# Altium PCB Strommessplatine.PcbDoc (part 1 of 2)
Units mm, origin at the board's own origin, x right, y up, seen from the top; angles counter-clockwise.
Board outline 160 x 100 mm, 4 copper layers (Top Layer, GND, VCC+, 2V5_OCM), stack 1.744 mm thick; 210 components, 62 nets, 482 pads, 189 vias.
Unrouted connection lines stored in the file: 1.
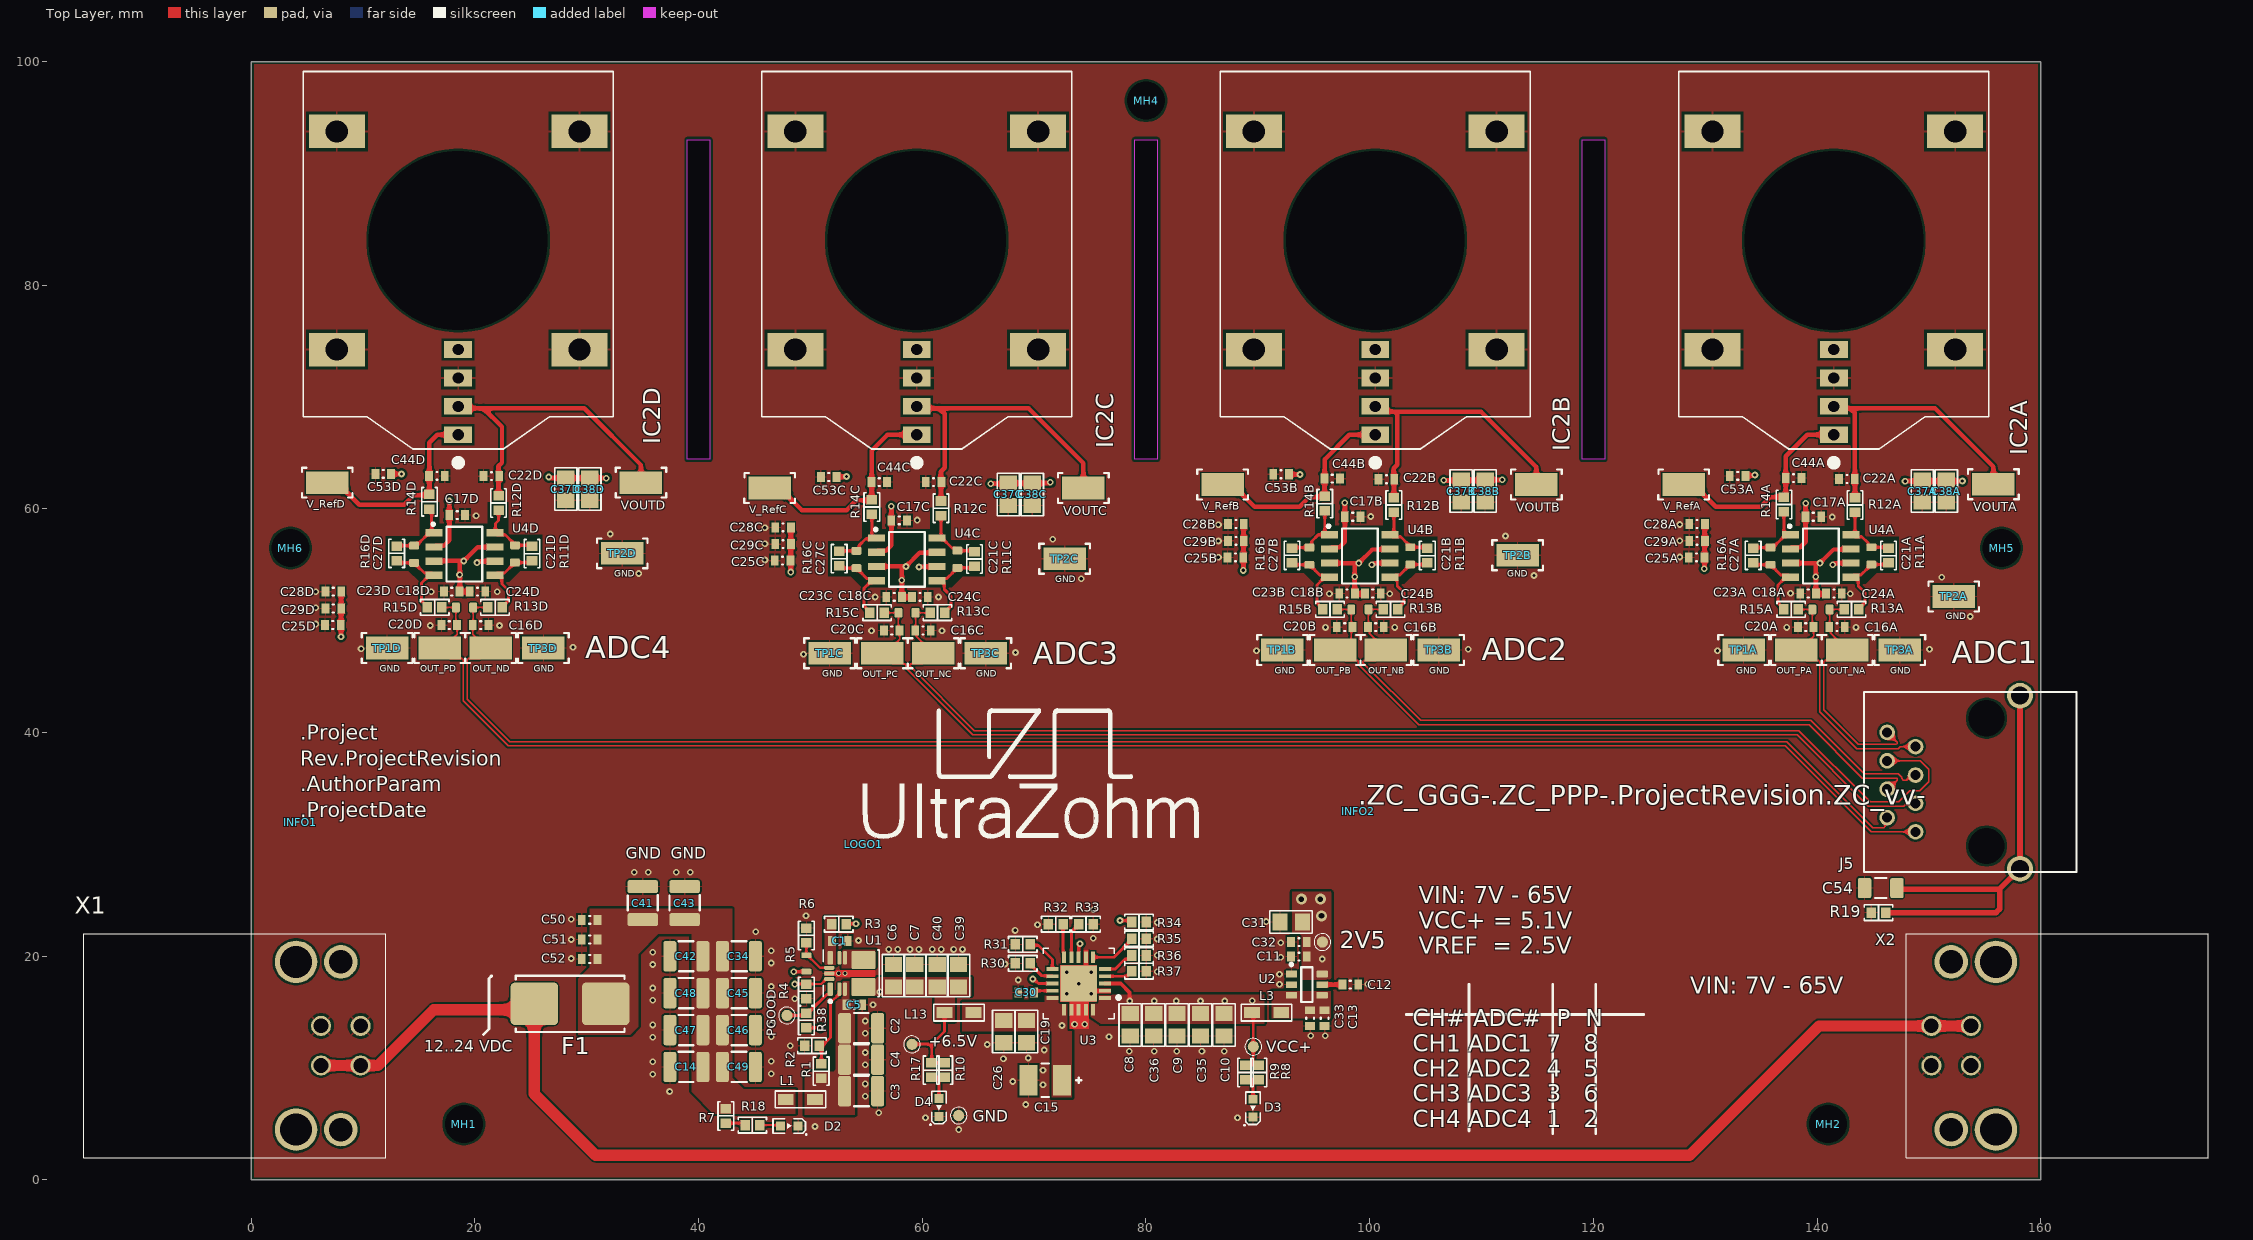
[diagram p0: Top Layer view]
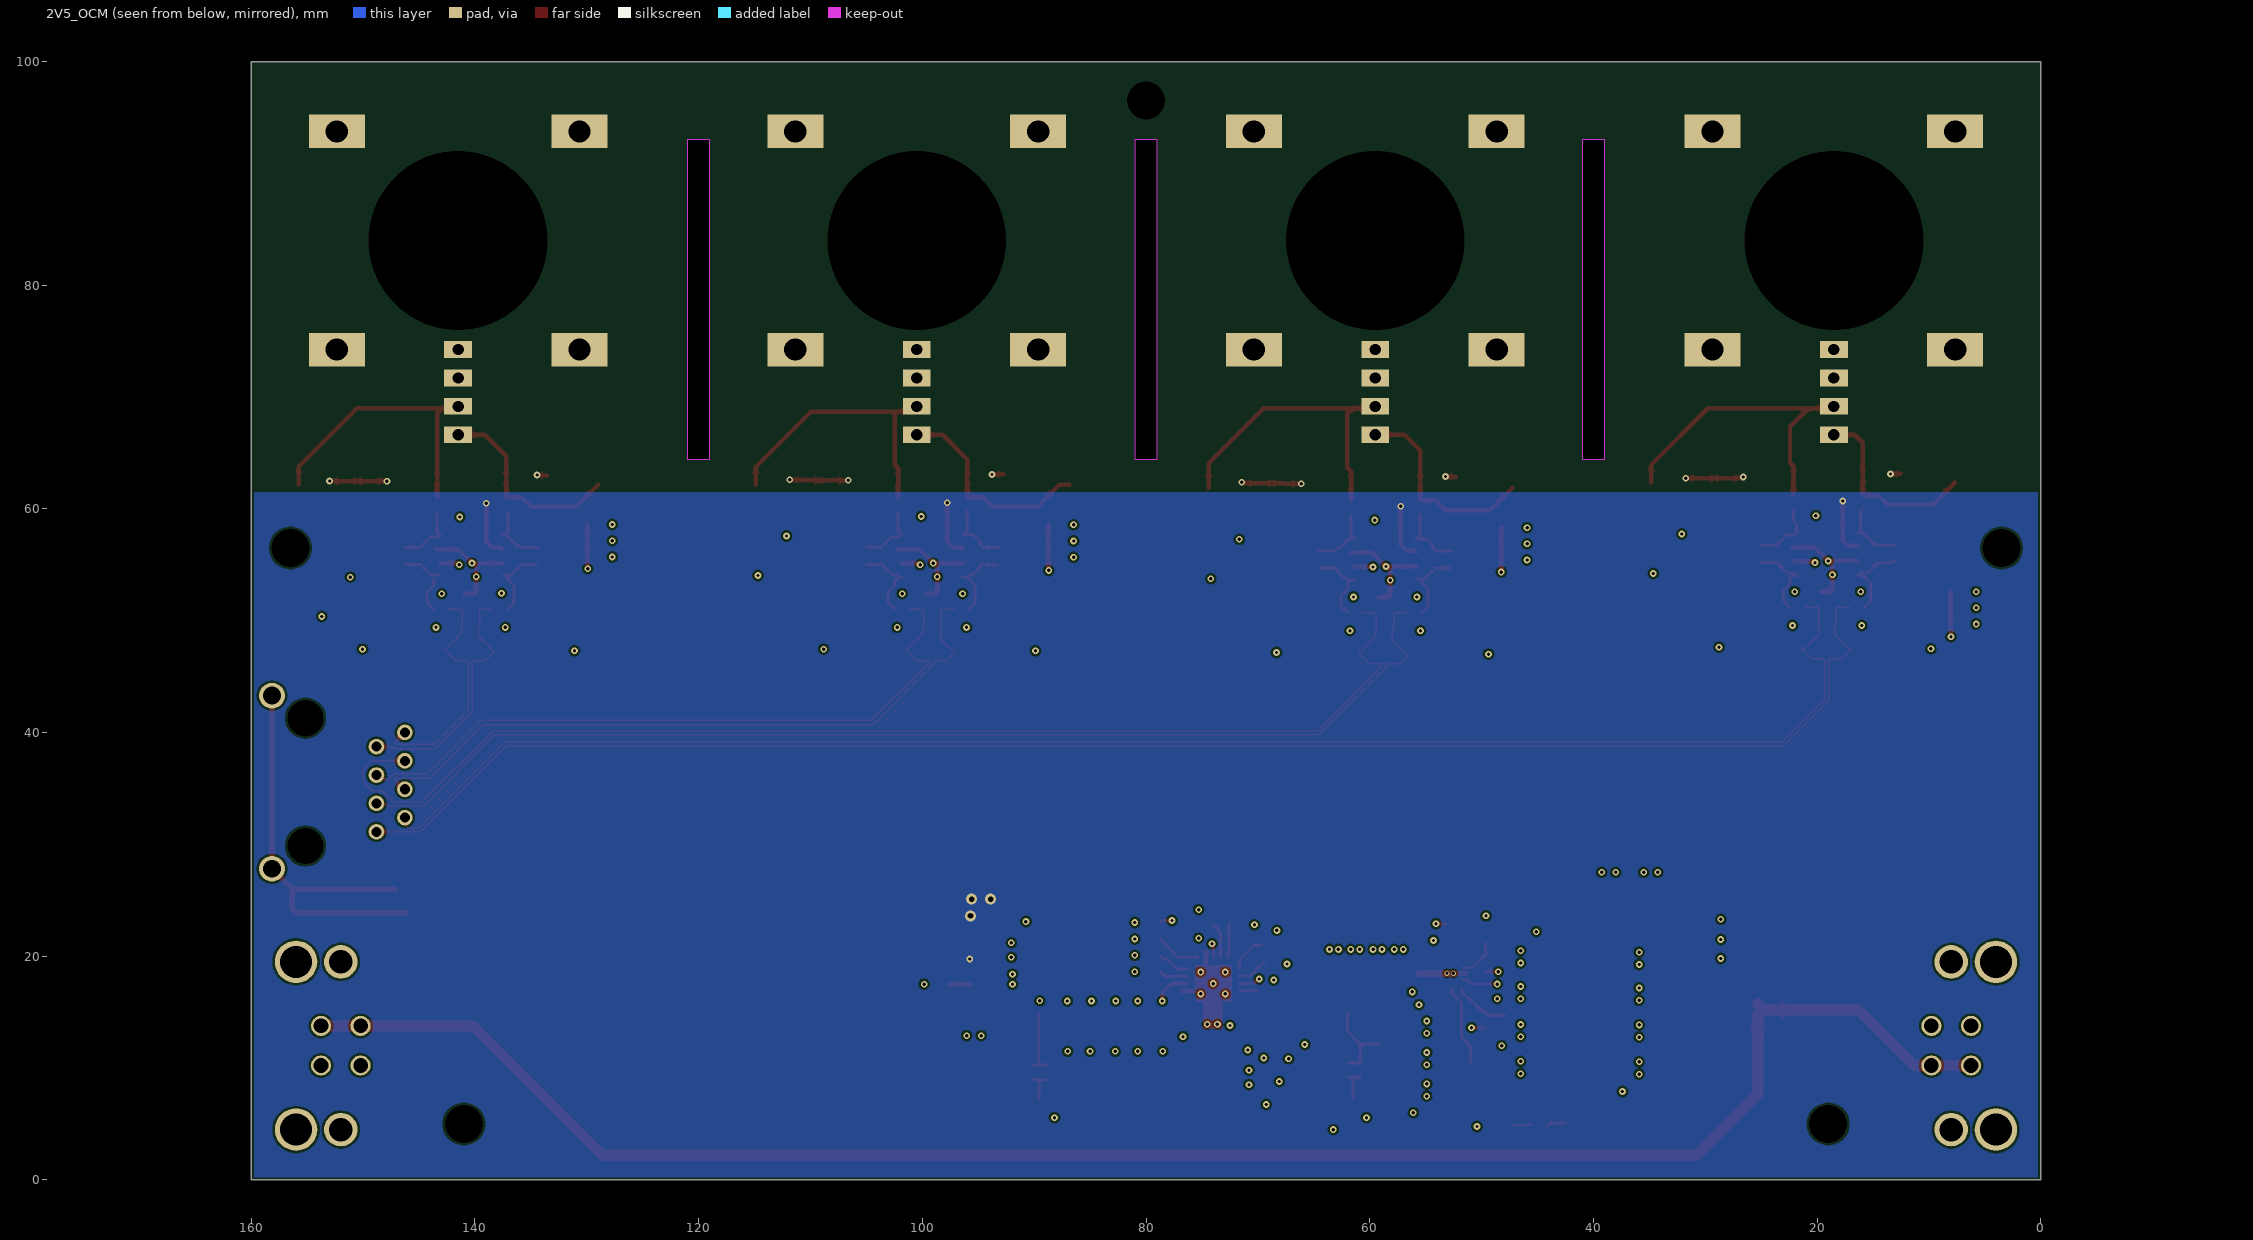
[diagram p1: 2V5_OCM view, seen from below]
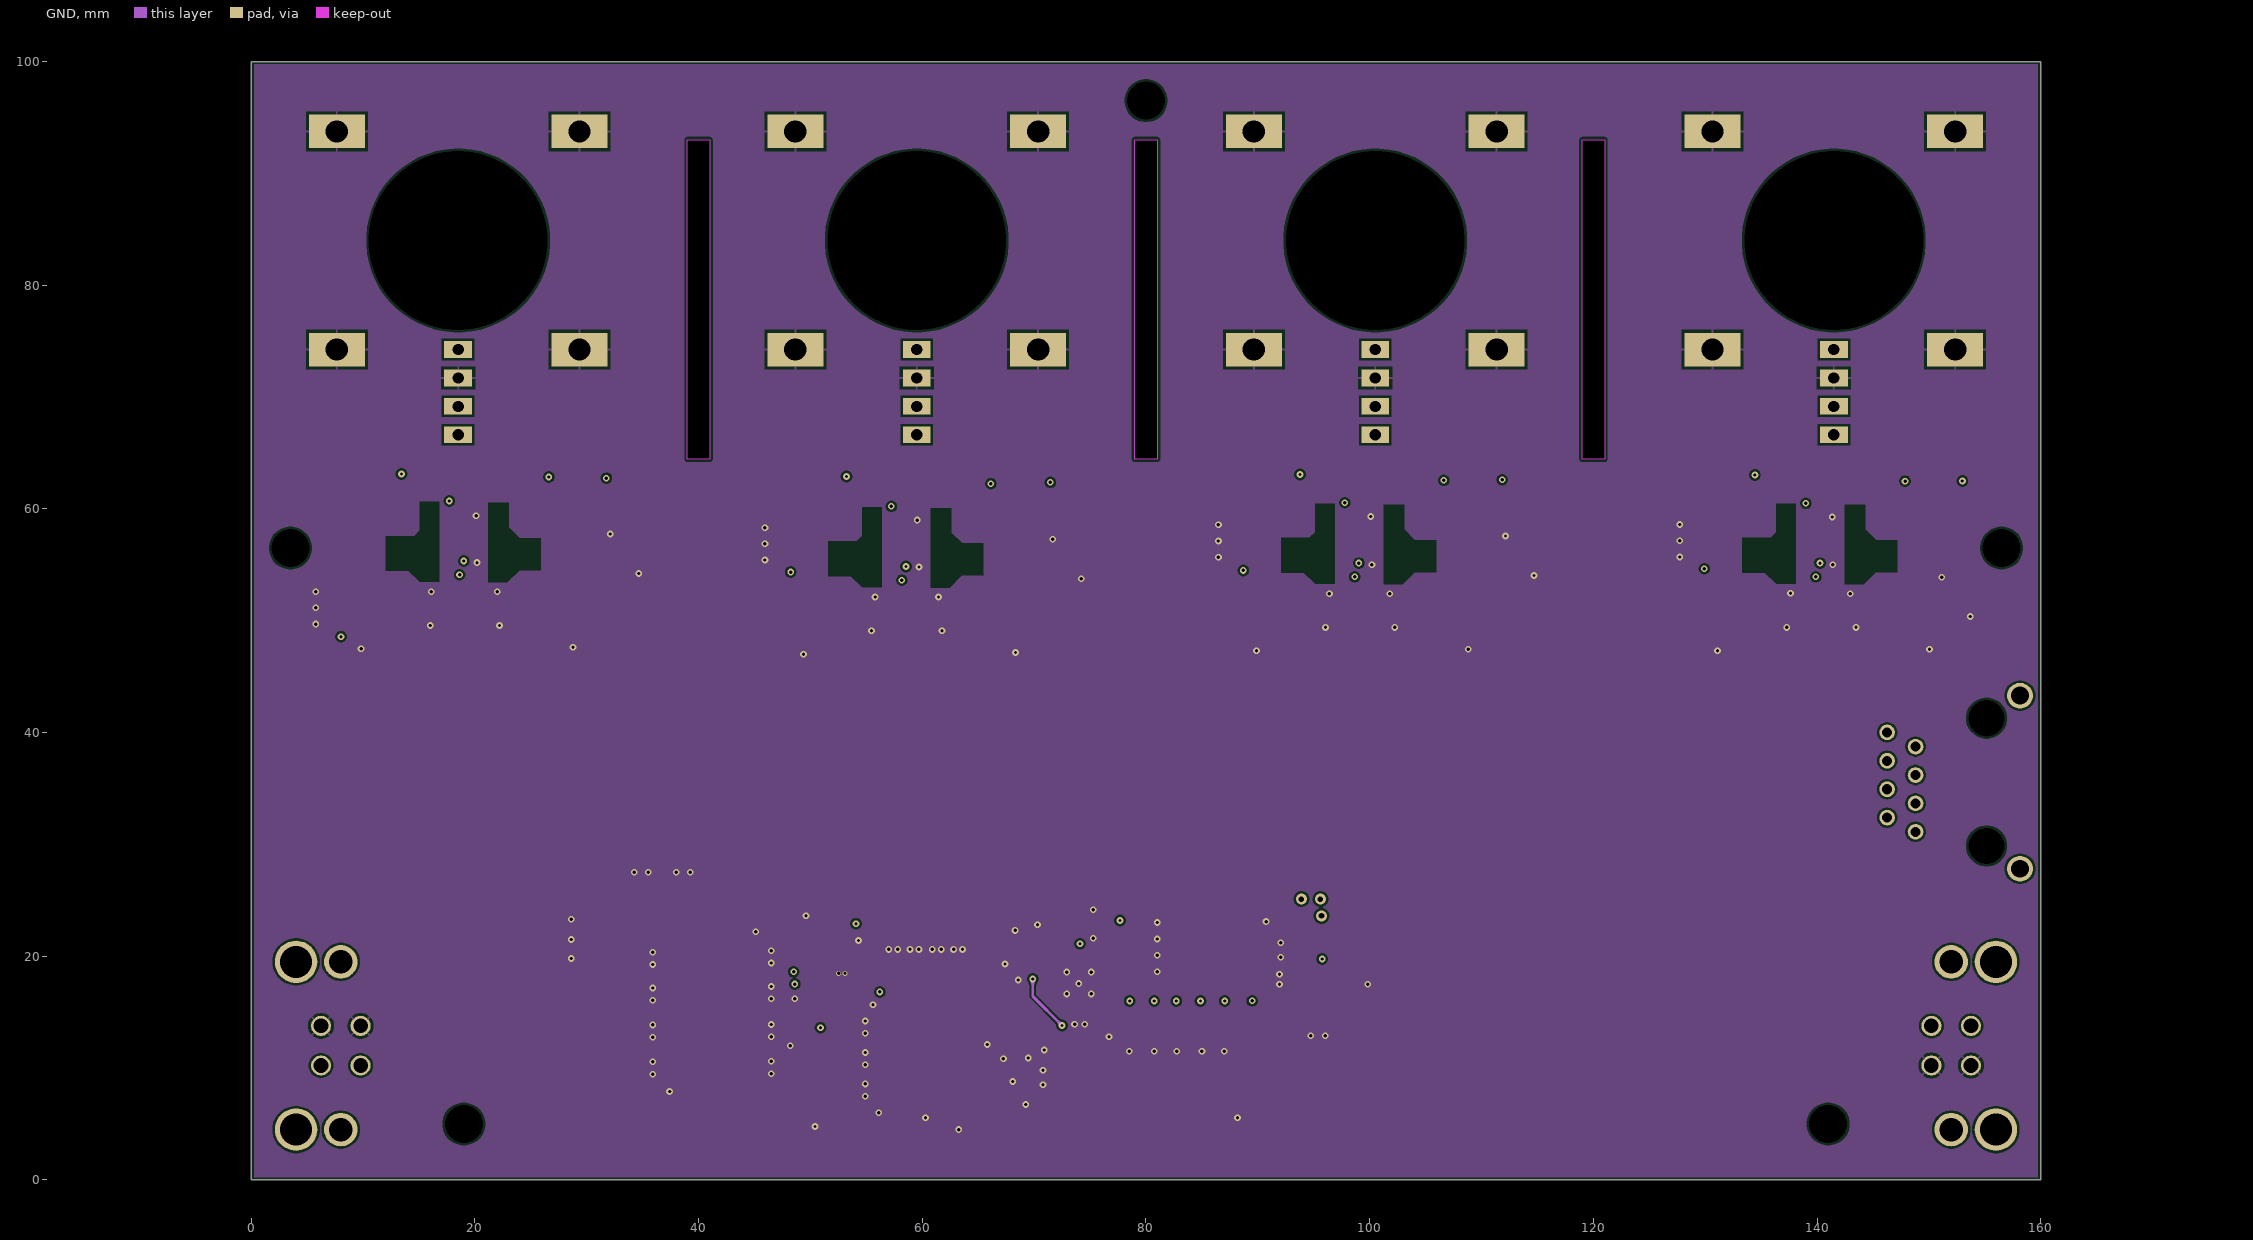
[diagram p2: GND]
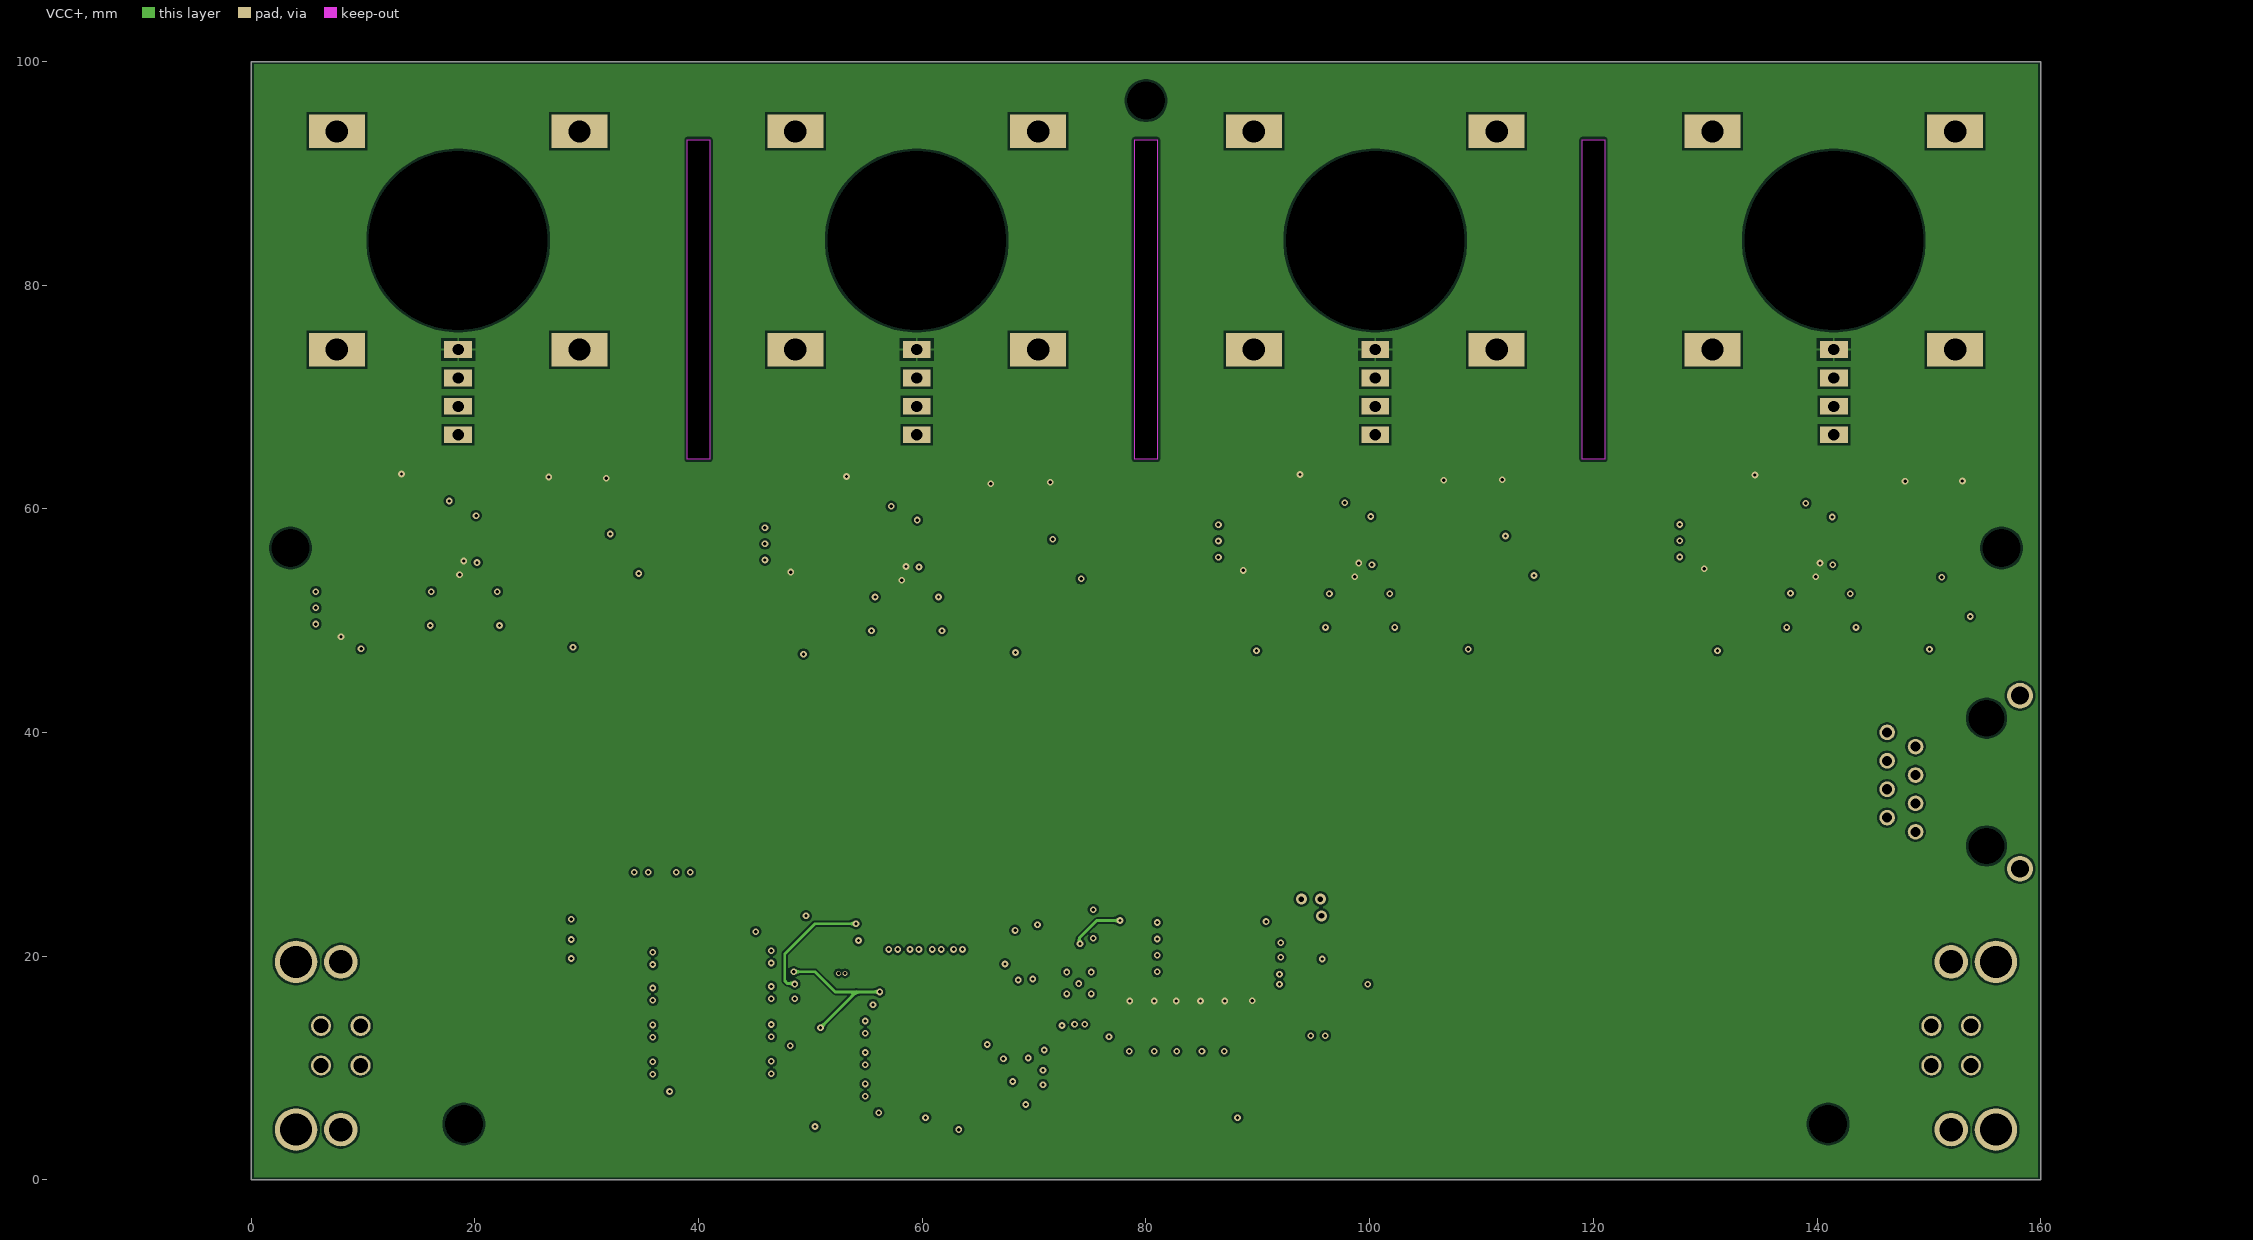
[diagram p3: VCC+]
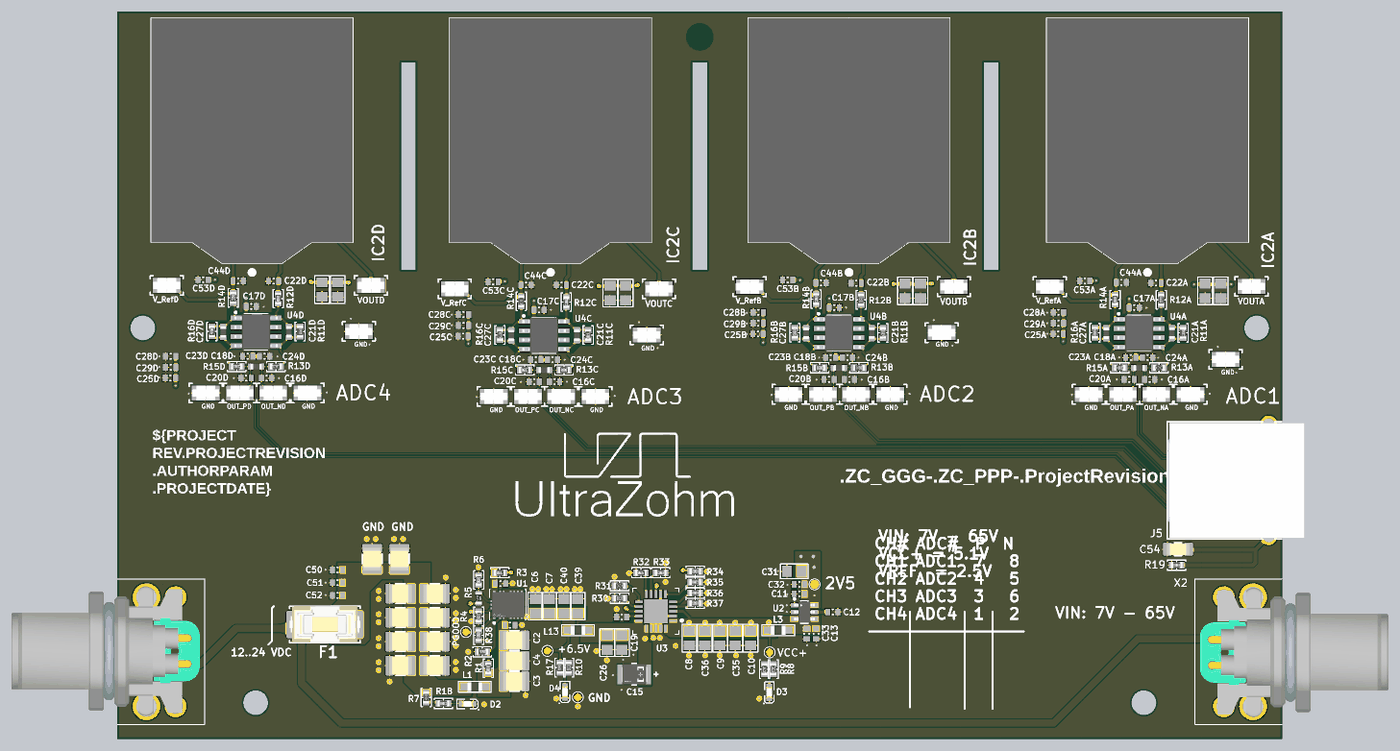
[diagram p5: 3D render of the assembled board from above, using the file's embedded part models]

## Layer stack, top to bottom
Top Solder: solder mask 0.01, Solder Resist, Dk 3.5
Top Layer: signal copper 0.07
Dielectric 2: prepreg 0.0994, JLC3313, Dk 4.05
GND: signal copper 0.07
Core: core 1.265, FR4, Dk 4.6
VCC+: signal copper 0.07
Dielectric 4: prepreg 0.0994, JLC3313, Dk 4.05
2V5_OCM: signal copper 0.07
Bottom Solder: solder mask 0.01, Solder Resist, Dk 3.5

## Board outline
0,0 0,100 160,100 160,0
cut-out: 79,64.46 79,93 80.999,93 80.999,64.46
cut-out: 39,64.46 39,93 40.999,93 40.999,64.46
cut-out: 119.002,64.46 119.002,93 121,93 121,64.46

## Design rules (kind name [scope] priority, off if disabled: settings)
BoardOutlineClearance [All] p1: gap=0.254 ignorepadtopadclearanceinfootprint=FALSE except(0: Arc-SplitContinuation Track-SplitContinuation SMDPad-SplitContinuation THPad-SplitContinuation Via-SplitContinuation Fill-SplitContinuation Poly-SplitContinuation Region-SplitContinuation Text-SplitContinuation)
Clearance Clearance_Power [InNetClass('All Nets')] p1: gap=0.2 ignorepadtopadclearanceinfootprint=FALSE except(0.1: SMDPad-SMDPad SMDPad-Fill SMDPad-Poly SMDPad-Region; 0.127: SMDPad-THPad THPad-THPad; 0.15: Arc-SMDPad Arc-Fill Arc-Poly Arc-Region Track-SMDPad Track-Fill Track-Poly Track-Region; 0.254: Arc-Arc Arc-Track Arc-Via Arc-Text Track-Track Track-Via Track-Text)
DiffPairsRouting [All] p1: maxlimit=0.254 minlimit=0.127 mostfreqgap=0.254 toplayer_minwidth=0.127 toplayer_maxwidth=0.127 toplayer_prefwidth=0.127 midlayer1_minwidth=0.127 midlayer1_maxwidth=0.127 midlayer1_prefwidth=0.127 midlayer2_minwidth=0.127 midlayer2_maxwidth=0.127 midlayer2_prefwidth=0.127 bottomlayer_minwidth=0.127 bottomlayer_maxwidth=0.127 bottomlayer_prefwidth=0.127 maxuncoupledlength=12.7
Height [All] p1: minheight=0 maxheight=40 prefheight=12.7
PolygonConnect PolygonConnect_GND [InNet('GND')] p1: thpad.connectstyle=Relief thpad.reliefconductorwidth=0.2 thpad.reliefentries=4 thpad.polygonreliefangle="90 Angle" thpad.airgapwidth=0.254 thpad.conductorbypadedge=TRUE thpad.mindistance=0.381 thpad.enablemindistance=FALSE smdpad.connectstyle=Relief smdpad.reliefconductorwidth=0.15 smdpad.reliefentries=4 smdpad.polygonreliefangle="90 Angle" smdpad.airgapwidth=0.15 via.connectstyle=Direct via.reliefconductorwidth=0.254 via.reliefentries=4 via.polygonreliefangle="90 Angle" via.airgapwidth=0.254
PolygonConnect PolygonConnect_VCC [InNet('VCC+')] p2: thpad.connectstyle=Relief thpad.reliefconductorwidth=0.2 thpad.reliefentries=4 thpad.polygonreliefangle="90 Angle" thpad.airgapwidth=0.254 thpad.conductorbypadedge=TRUE thpad.mindistance=0.381 thpad.enablemindistance=FALSE smdpad.connectstyle=Direct smdpad.reliefconductorwidth=0.15 smdpad.reliefentries=4 smdpad.polygonreliefangle="90 Angle" smdpad.airgapwidth=0.15 via.connectstyle=Direct via.reliefconductorwidth=0.254 via.reliefentries=4 via.polygonreliefangle="90 Angle" via.airgapwidth=0.254
PolygonConnect [All] p3: connectstyle=Direct reliefconductorwidth=0.254 reliefentries=4 polygonreliefangle="90 Angle" airgapwidth=0.254
RoomDefinition CurrentMeasuerment_1 [InComponentClass('CurrentMeasuerment_1')] p1: confinementstyle=ConfineIn formatcopy=TRUE lockcomponents=FALSE outline 123.904,44.725 159.425,44.725 159.425,100.7 123.904,100.7
RoomDefinition CurrentMeasuerment_2 [InComponentClass('CurrentMeasuerment_2')] p2: confinementstyle=ConfineIn formatcopy=TRUE lockcomponents=FALSE outline 82.95,44.675 118.375,44.675 118.375,100.775 82.95,100.775
RoomDefinition U_Spannungswandlung [InComponentClass('U_Spannungswandlung')] p3: confinementstyle=ConfineIn formatcopy=TRUE lockcomponents=FALSE outline 33.025,0.675 102.475,0.675 102.475,28.475 33.025,28.475
RoomDefinition CurrentMeasuerment_3 [InComponentClass('CurrentMeasuerment_3')] p4: confinementstyle=ConfineIn formatcopy=TRUE lockcomponents=FALSE outline 41.725,44.3 77.75,44.3 77.75,100.55 41.725,100.55
RoomDefinition CurrentMeasuerment_4 [InComponentClass('CurrentMeasuerment_4')] p5: confinementstyle=ConfineIn formatcopy=TRUE lockcomponents=FALSE outline 1.525,44.275 37.675,44.275 37.675,100.4 1.525,100.4
RoutingVias [All] p1: holewidth=0 width=0 viastyle="Through Hole" minholewidth=0 minwidth=0 maxholewidth=0.711 maxwidth=1.27
SolderMaskExpansion [All] p1: expansion=0.102 istentingtop=FALSE
UnRoutedNet [All] p1: checkbadconnections=TRUE
Width [All] p1: maxlimit=10 minlimit=0.16 preferedwidth=0.254 midlayer1_maxwidth=0.254 midlayer2_maxwidth=0.254 minimp=50.000000 maximp=50.000000 favimp=50.000000
27 further rules are at their usual default settings.

## Classes and differential pairs
component class Power_Supply: C50 C51 C52 F1 X1 X2
channel class Measurement: CurrentMeasuerment_1 CurrentMeasuerment_2 CurrentMeasuerment_3 CurrentMeasuerment_4
component class U_Spannungswandlung: 2V5 +6.5V C1 C2 C3 C4 C5 C6 C7 C8 C9 C10 C11 C12 C13 C15 C19 C26 C30 C31 C32 C33 C35 C36 C39 C40 D2 D3 D4 GND L1 L3 L13 PGOOD R1 R2 R3 R4 R5 R6 R7 R8 R9 R10 R17 R18 R30 R31 R32 R33 R34 R35 R36 R37 R38 U1 U2 U3 VCC+
component class TopSheet: C14 C34 C41 C42 C43 C45 C46 C47 C48 C49 C54 INFO1 INFO2 J5 LOGO1 MH1 MH2 MH4 MH5 MH6 R19
component class CurrentMeasuerment_4: C16D C17D C18D C20D C21D C22D C23D C24D C25D C27D C28D C29D C37D C38D C44D C53D IC2D OUT_ND OUT_PD R11D R12D R13D R14D R15D R16D TP1D TP2D TP3D U4D V_RefD VOUTD
component class CurrentMeasuerment_3: C16C C17C C18C C20C C21C C22C C23C C24C C25C C27C C28C C29C C37C C38C C44C C53C IC2C OUT_NC OUT_PC R11C R12C R13C R14C R15C R16C TP1C TP2C TP3C U4C V_RefC VOUTC
component class CurrentMeasuerment_2: C16B C17B C18B C20B C21B C22B C23B C24B C25B C27B C28B C29B C37B C38B C44B C53B IC2B OUT_NB OUT_PB R11B R12B R13B R14B R15B R16B TP1B TP2B TP3B U4B V_RefB VOUTB
component class CurrentMeasuerment_1: C16A C17A C18A C20A C21A C22A C23A C24A C25A C27A C28A C29A C37A C38A C44A C53A IC2A OUT_NA OUT_PA R11A R12A R13A R14A R15A R16A TP1A TP2A TP3A U4A V_RefA VOUTA
differential pair I3_OUT: +I3_OUT_P -I3_OUT_N
differential pair I4_OUT: +I4_OUT_P -I4_OUT_N
differential pair I2_OUT: +I2_OUT_P -I2_OUT_N
differential pair I1_OUT: +I1_OUT_P -I1_OUT_N

## Components (designator, comment, footprint, x,y, rotation, side; value= is the part's Value field where it differs from the comment)
2V5 "2V5" TP_1mm 95.772,21.264 r90 top value="Testpoint 1mm"
+6.5V "6.5 V" TP_1mm 59.075,12.125 r90 top value="Testpoint 1mm"
C1 "1 µF" C_0603 52.629,21.364 r0 top
C2 "2.2 µF" C_1210_TE 54.529,13.564 r0 top
C3 "2.2 µF" C_1210_TE 54.529,7.939 r0 top
C4 "2.2 µF" C_1210_TE 54.529,10.751 r0 top
C5 "100 nF" C_0603 53.929,15.664 r180 top
C6 "10 µF" C0805 57.429,18.264 r270 top
C7 "10 µF" C0805 59.329,18.264 r270 top
C8 "10 µF" C0805 78.579,13.864 r90 top
C9 "10 µF" C0805 82.779,13.864 r90 top
C10 "10 µF" C0805 86.979,13.864 r90 top
C11 "1 µF" C_0603 93.679,19.964 r0 top
C12 "1 µF" C_0603 98.279,17.464 r180 top
C13 "1 µF" C_0603 95.979,14.464 r90 top
C14 "2.2 µF" C_1210_TE 38.9,10.1 r180 top
C15 "47 uF" 10TPE47MAZB 70.994,8.911 r0 top
C16A "470 pF" C_0603 141.787,49.425 r180 top (schematic designator C16)
C16B "470 pF" C_0603 100.558,49.425 r180 top (schematic designator C16)
C16C "470 pF" C_0603 60.06,49.125 r180 top (schematic designator C16)
C16D "470 pF" C_0603 20.5,49.6 r180 top (schematic designator C16)
C17A "100 nF" C_0603 139.675,59.3 r0 top (schematic designator C17)
C17B "100 nF" C_0603 98.475,59.3 r0 top (schematic designator C17)
C17C "100 nF" C_0603 57.925,58.975 r0 top (schematic designator C17)
C17D "100 nF" C_0603 18.4,59.45 r0 top (schematic designator C17)
C18A "5.6nF" C_0603_TE 140.354,51.011 r270 top (schematic designator C18)
C18B "5.6nF" C_0603_TE 99.125,51.011 r270 top (schematic designator C18)
C18C "5.6nF" C_0603_TE 58.627,50.711 r270 top (schematic designator C18)
C18D "5.6nF" C_0603_TE 19.067,51.186 r270 top (schematic designator C18)
C19 "10 µF" C0805 69.316,13.264 r90 top
C20A "470 pF" C_0603 138.987,49.425 r180 top (schematic designator C20)
C20B "470 pF" C_0603 97.758,49.425 r180 top (schematic designator C20)
C20C "470 pF" C_0603 57.26,49.125 r180 top (schematic designator C20)
C20D "470 pF" C_0603 17.7,49.6 r180 top (schematic designator C20)
C21A "22pF" C_0603_TE 144.862,55.8 r180 top (schematic designator C21)
C21B "22pF" C_0603_TE 103.633,55.8 r180 top (schematic designator C21)
C21C "22pF" C_0603_TE 63.135,55.5 r180 top (schematic designator C21)
C21D "22pF" C_0603_TE 23.575,55.975 r180 top (schematic designator C21)
C22A "4.7 nF" C_0603 142.675,62.675 r0 top (schematic designator C22)
C22B "4.7 nF" C_0603 101.5,62.65 r0 top (schematic designator C22)
C22C "4.7 nF" C_0603 61,62.4 r0 top (schematic designator C22)
C22D "4.7 nF" C_0603 21.475,62.925 r0 top (schematic designator C22)
C23A "100 nF" C_0603 139.206,52.433 r0 top (schematic designator C23)
C23B "100 nF" C_0603 97.978,52.433 r0 top (schematic designator C23)
C23C "100 nF" C_0603 57.48,52.133 r0 top (schematic designator C23)
C23D "100 nF" C_0603 17.92,52.608 r0 top (schematic designator C23)
C24A "100 nF" C_0603 141.512,52.433 r180 top (schematic designator C24)
C24B "100 nF" C_0603 100.284,52.433 r180 top (schematic designator C24)
C24C "100 nF" C_0603 59.786,52.133 r180 top (schematic designator C24)
C24D "100 nF" C_0603 20.226,52.608 r180 top (schematic designator C24)
C25A "1 µF" C_0603 129.228,55.667 r0 top (schematic designator C25)
C25B "1 µF" C_0603 87.999,55.667 r0 top (schematic designator C25)
C25C "1 µF" C_0603 47.501,55.367 r0 top (schematic designator C25)
C25D "1 µF" C_0603 7.291,49.617 r0 top (schematic designator C25)
C26 "10 µF" C0805 67.279,13.264 r90 top
C27A "22pF" C_0603_TE 135.837,55.775 r180 top (schematic designator C27)
C27B "22pF" C_0603_TE 94.608,55.775 r180 top (schematic designator C27)
C27C "22pF" C_0603_TE 54.11,55.475 r180 top (schematic designator C27)
C27D "22pF" C_0603_TE 14.55,55.95 r180 top (schematic designator C27)
C28A "100 nF" C_0603 129.272,58.647 r0 top (schematic designator C28)
C28B "100 nF" C_0603 88.043,58.647 r0 top (schematic designator C28)
C28C "100 nF" C_0603 47.545,58.347 r0 top (schematic designator C28)
C28D "100 nF" C_0603 7.335,52.597 r0 top (schematic designator C28)
C29A "100 nF" C_0603 129.272,57.147 r0 top (schematic designator C29)
C29B "100 nF" C_0603 88.043,57.147 r0 top (schematic designator C29)
C29C "100 nF" C_0603 47.545,56.847 r0 top (schematic designator C29)
C29D "100 nF" C_0603 7.335,51.097 r0 top (schematic designator C29)
C30 "1 µF" C_0603 69.279,16.764 r180 top
C31 "10 µF" C0805 92.979,23.064 r0 top
C32 "100 nF" C_0603 93.679,21.264 r0 top
C33 "100 nF" C_0603 94.679,14.464 r90 top
C34 "2.2 µF" C_1210_TE 43.6,20 r0 top
C35 "10 µF" C0805 84.879,13.864 r90 top
C36 "10 µF" C0805 80.679,13.864 r90 top
C37A "10 µF" C0805 149.414,61.599 r90 top (schematic designator C37)
C37B "10 µF" C0805 108.185,61.599 r90 top (schematic designator C37)
C37C "10 µF" C0805 67.687,61.299 r90 top (schematic designator C37)
C37D "10 µF" C0805 28.127,61.774 r90 top (schematic designator C37)
C38A "10 µF" C0805 151.554,61.6 r90 top (schematic designator C38)
C38B "10 µF" C0805 110.325,61.6 r90 top (schematic designator C38)
C38C "10 µF" C0805 69.827,61.3 r90 top (schematic designator C38)
C38D "10 µF" C0805 30.267,61.775 r90 top (schematic designator C38)
C39 "10 µF" C0805 63.229,18.264 r270 top
C40 "10 µF" C0805 61.329,18.264 r270 top
C41 "2.2 µF" C_1210_TE 35,24.75 r90 top
C42 "2.2 µF" C_1210_TE 38.9,20 r180 top
C43 "2.2 µF" C_1210_TE 38.75,24.75 r90 top
C44A "4.7 nF" C_0603 137.9,62.75 r180 top (schematic designator C44)
C44B "4.7 nF" C_0603 96.65,62.7 r180 top (schematic designator C44)
C44C "4.7 nF" C_0603 56.15,62.4 r180 top (schematic designator C44)
C44D "4.7 nF" C_0603 16.6,62.95 r180 top (schematic designator C44)
C45 "2.2 µF" C_1210_TE 43.6,16.7 r0 top
C46 "2.2 µF" C_1210_TE 43.6,13.4 r0 top
C47 "2.2 µF" C_1210_TE 38.9,13.4 r180 top
C48 "2.2 µF" C_1210_TE 38.9,16.7 r180 top
C49 "2.2 µF" C_1210_TE 43.6,10.1 r0 top
C50 "1 µF" C_0603 30.25,23.25 r180 top
C51 "1 µF" C_0603 30.25,21.5 r180 top
C52 "1 µF" C_0603 30.25,19.75 r180 top
C53A "47 nF" C_0603 132.9,62.95 r0 top (schematic designator C53)
C53B "47 nF" C_0603 92.075,63.1 r0 top (schematic designator C53)
C53C "47 nF" C_0603 51.625,62.85 r0 top (schematic designator C53)
C53D "47 nF" C_0603 11.792,63.125 r0 top (schematic designator C53)
C54 "100pF" C_1206_TE 145.7,26.1 r270 top
D2 "KT-0603R" WL-SMCW_0603 48.1,4.825 r180 top
D3 "KT-0603R" WL-SMCW_0603 89.564,6.411 r90 top
D4 "KT-0603R" WL-SMCW_0603 61.489,6.464 r90 top
F1 "Fuse, 5 A" 0154xxx 28.5,15.75 r0 top
GND "Testpoint 1mm" TP_1mm 63.25,5.75 r0 top
IC2A "HC5FW 100-S" LEM_HC5FW 141.5,66.63 r0 top locked value=100A (schematic designator IC2)
IC2B "HC5FW 100-S" LEM_HC5FW 100.5,66.63 r0 top locked value=100A (schematic designator IC2)
IC2C "HC5FW 100-S" LEM_HC5FW 59.5,66.63 r0 top locked value=100A (schematic designator IC2)
IC2D "HC5FW 100-S" LEM_HC5FW 18.5,66.63 r0 top locked value=100A (schematic designator IC2)
INFO1 "Design Information" Design_info 4.375,32 r0 top
INFO2 "ZC Serialnumber" ZC-Serial 99,32.95 r0 top value=GGG-PPP-VVvv
J5 "R-RJ45R10P-B000" R-RJ45R10P-B000 152.65,35.55 r90 top
L1 "600 Ohm" "WE-CBF_0805_High Current" 49.1,7.2 r0 top
L3 "600 Ohm" "WE-CBF_0805_High Current" 90.779,14.964 r0 top
L13 "600 Ohm" "WE-CBF_0805_High Current" 63.279,14.964 r0 top
LOGO1 "UZ Logo" UZ_Logo_small 54.75,30 r0 top value=Logo
MH1 "Mounting Hole" MH_3.4#1 39.3,7.1 r90 top locked
MH2 "Mounting Hole" MH_3.4#2 156.5,3.5 r90 top locked
MH4 "Mounting Hole" MH_3.4#3 206.4,19.9 r90 top
MH5 "Mounting Hole" MH_3.4#4 156.5,55 r90 top locked
MH6 "Mounting Hole" MH_3.4#4 3.5,55 r90 top locked
OUT_NA "5015" KSTN-5019_V 142.686,47.385 r180 top value="SMD Testpoint" (schematic designator OUT_N)
OUT_NB "5015" KSTN-5019_V 101.457,47.385 r180 top value="SMD Testpoint" (schematic designator OUT_N)
OUT_NC "5015" KSTN-5019_V 60.959,47.085 r180 top value="SMD Testpoint" (schematic designator OUT_N)
OUT_ND "5015" KSTN-5019_V 21.399,47.56 r180 top value="SMD Testpoint" (schematic designator OUT_N)
OUT_PA "5015" KSTN-5019_V 138.144,47.385 r180 top value="SMD Testpoint" (schematic designator OUT_P)
OUT_PB "5015" KSTN-5019_V 96.915,47.385 r180 top value="SMD Testpoint" (schematic designator OUT_P)
OUT_PC "5015" KSTN-5019_V 56.417,47.085 r180 top value="SMD Testpoint" (schematic designator OUT_P)
OUT_PD "5015" KSTN-5019_V 16.857,47.56 r180 top value="SMD Testpoint" (schematic designator OUT_P)
PGOOD "Testpoint 1mm" TP_1mm 47.894,14.711 r90 top
R1 "10k" "RES 0603_1608" 50.95,9.725 r270 top
R2 "100k" "RES 0603_1608" 50.127,12 r180 top
R3 "0R" "RES 0603_1608" 52.529,22.864 r180 top
R4 "0R" "RES 0603_1608" 49.629,16.864 r90 top
R5 "51k" R_0603_TE 49.629,19.364 r0 top
R6 "10k" "RES 0603_1608" 49.629,21.864 r90 top
R7 "10k" "RES 0603_1608" 42.425,5.725 r270 top
R8 "10k" "RES 0603_1608" 90.094,9.611 r270 top
R9 "10k" "RES 0603_1608" 88.894,9.611 r270 top
R10 "10k" "RES 0603_1608" 61.994,9.811 r270 top
R11A "2k" "RES 0603_1608" 146.387,55.825 r270 top (schematic designator R11)
R11B "2k" "RES 0603_1608" 105.158,55.825 r270 top (schematic designator R11)
R11C "2k" "RES 0603_1608" 64.66,55.525 r270 top (schematic designator R11)
R11D "2k" "RES 0603_1608" 25.1,56 r270 top (schematic designator R11)
R12A "1k 0.1%" "RES 0603_1608" 143.396,60.356 r270 top value=1k (schematic designator R12)
R12B "1k 0.1%" "RES 0603_1608" 102.167,60.356 r270 top value=1k (schematic designator R12)
R12C "1k 0.1%" "RES 0603_1608" 61.669,60.056 r270 top value=1k (schematic designator R12)
R12D "1k 0.1%" "RES 0603_1608" 22.109,60.531 r270 top value=1k (schematic designator R12)
R13A "49R9" "RES 0603_1608" 143.087,51.025 r180 top (schematic designator R13)
R13B "49R9" "RES 0603_1608" 101.858,51.025 r180 top (schematic designator R13)
R13C "49R9" "RES 0603_1608" 61.36,50.725 r180 top (schematic designator R13)
R13D "49R9" "RES 0603_1608" 21.8,51.2 r180 top (schematic designator R13)
R14A "1k 0.1%" "RES 0603_1608" 137.041,60.4 r270 top value=1k (schematic designator R14)
R14B "1k 0.1%" "RES 0603_1608" 95.984,60.465 r270 top value=1k (schematic designator R14)
R14C "1k 0.1%" "RES 0603_1608" 55.486,60.165 r270 top value=1k (schematic designator R14)
R14D "1k 0.1%" "RES 0603_1608" 15.926,60.64 r270 top value=1k (schematic designator R14)
R15A "49R9" "RES 0603_1608" 137.687,51.025 r0 top (schematic designator R15)
R15B "49R9" "RES 0603_1608" 96.458,51.025 r0 top (schematic designator R15)
R15C "49R9" "RES 0603_1608" 55.96,50.725 r0 top (schematic designator R15)
R15D "49R9" "RES 0603_1608" 16.4,51.2 r0 top (schematic designator R15)
R16A "2k" "RES 0603_1608" 134.287,55.85 r270 top (schematic designator R16)
R16B "2k" "RES 0603_1608" 93.058,55.85 r270 top (schematic designator R16)
R16C "2k" "RES 0603_1608" 52.56,55.55 r270 top (schematic designator R16)
R16D "2k" "RES 0603_1608" 13,56.025 r270 top (schematic designator R16)
R17 "10k" "RES 0603_1608" 60.794,9.811 r270 top
R18 "10k" "RES 0603_1608" 44.8,4.9 r0 top
R19 "1M" "RES 0603_1608" 145.5,23.9 r180 top
R30 "0R" "RES 0603_1608" 68.979,19.364 r180 top
R31 "0R" "RES 0603_1608" 68.979,21.064 r0 top
R32 "0R" "RES 0603_1608" 71.929,22.864 r0 top
R33 "0R" "RES 0603_1608" 74.629,22.864 r180 top
R34 "0R" "RES 0603_1608" 79.379,23.064 r180 top
R35 "0R" "RES 0603_1608" 79.379,21.564 r0 top
R36 "0R" "RES 0603_1608" 79.379,20.064 r180 top
R37 "0R" "RES 0603_1608" 79.379,18.664 r180 top
R38 "10k" "RES 0603_1608" 49.629,14.264 r270 top
TP1A "5015" KSTN-5019_V 133.432,47.385 r180 top value="SMD Testpoint" (schematic designator TP1)
TP1B "5015" KSTN-5019_V 92.203,47.385 r180 top value="SMD Testpoint" (schematic designator TP1)
TP1C "5015" KSTN-5019_V 51.705,47.085 r180 top value="SMD Testpoint" (schematic designator TP1)
TP1D "5015" KSTN-5019_V 12.145,47.56 r180 top value="SMD Testpoint" (schematic designator TP1)
TP2A "5015" KSTN-5019_V 152.225,52.175 r180 top value="SMD Testpoint" (schematic designator TP2)
TP2B "5015" KSTN-5019_V 113.225,55.85 r180 top value="SMD Testpoint" (schematic designator TP2)
TP2C "5015" KSTN-5019_V 72.727,55.55 r180 top value="SMD Testpoint" (schematic designator TP2)
TP2D "5015" KSTN-5019_V 33.167,56.025 r180 top value="SMD Testpoint" (schematic designator TP2)
TP3A "5015" KSTN-5019_V 147.402,47.385 r0 top value="SMD Testpoint" (schematic designator TP3)
TP3B "5015" KSTN-5019_V 106.173,47.385 r0 top value="SMD Testpoint" (schematic designator TP3)
TP3C "5015" KSTN-5019_V 65.675,47.085 r0 top value="SMD Testpoint" (schematic designator TP3)
TP3D "5015" KSTN-5019_V 26.115,47.56 r0 top value="SMD Testpoint" (schematic designator TP3)
U1 "TPSM365R6" RDN0011A-MFG 53.729,18.464 r90 top
U2 "REF35250QDBVR" TI_SOT23_6-Leads 94.379,17.464 r0 top value=2.5V
U3 "TPS7A4701RGWR" QFN65P500X500X100-21N-D 73.979,17.564 r180 top value="5 V"
U4A "THS4521" SOIC127P600X175-8N 140.346,55.789 r0 top (schematic designator U4)
U4B "THS4521" SOIC127P600X175-8N 99.117,55.789 r0 top (schematic designator U4)
U4C "THS4521" SOIC127P600X175-8N 58.619,55.489 r0 top (schematic designator U4)
U4D "THS4521" SOIC127P600X175-8N 19.059,55.964 r0 top (schematic designator U4)
V_RefA "5015" KSTN-5019_V 128.079,62.175 r180 top value="SMD Testpoint" (schematic designator V_Ref)
V_RefB "5015" KSTN-5019_V 86.85,62.175 r180 top value="SMD Testpoint" (schematic designator V_Ref)
V_RefC "5015" KSTN-5019_V 46.352,61.875 r180 top value="SMD Testpoint" (schematic designator V_Ref)
V_RefD "5015" KSTN-5019_V 6.792,62.35 r180 top value="SMD Testpoint" (schematic designator V_Ref)
VCC+ "VCC+" TP_1mm 89.594,11.911 r90 top value="Testpoint 1mm"
VOUTA "5019" KSTN-5019_V 155.775,62.2 r0 top value="SMD Testpoint" (schematic designator VOUT)
VOUTB "5019" KSTN-5019_V 114.9,62.175 r0 top value="SMD Testpoint" (schematic designator VOUT)
VOUTC "5019" KSTN-5019_V 74.402,61.875 r0 top value="SMD Testpoint" (schematic designator VOUT)
VOUTD "5019" KSTN-5019_V 34.842,62.35 r0 top value="SMD Testpoint" (schematic designator VOUT)
X1 "CAZN_M12-P4A-GPL_M12" CAZN_M12-P4A-GPL_M12 8,12 r270 top
X2 "CAZN_M12-P4A-GPL_M12" CAZN_M12-P4A-GPL_M12 152,12 r90 top

## Footprints (in the part's own frame and the unit in brackets; to place one, negate y for a bottom-side part, rotate by r counter-clockwise, add the part's x,y. Pads: shape width x height; smd on the part's side, far side on the other; paste and mask are expansions set on the pad)
10TPE47MAZB [mm] "Tantalum Capacitors - Polymer 10volts 47uF ESR 35mohm"
  rect 1.6x2.7 smd paste+0 mask+0: 1(-1.5,0) 2(1.5,0)
  silkscreen extent -0.33,-1.5 3.25,1.5, body extent -1.75,-1.4 1.75,1.4, height 2
0154xxx [mm]
  rrect20% 4.24x3.81 smd: 1(-3.19,0) 2(3.19,0)
  silkscreen extent -4.85,-2.52 4.86,2.51, body extent -4.84,-2.49 4.86,2.51, height 3.71
C0805 [mm]
  rect 1.35x1.55 smd: 1(-1,0) 2(1,0)
  silkscreen extent -1.9,-1 1.9,1, body extent -1.1,-0.72 1.1,0.72, height 1.45
C_0603 [mm] "Chip Capacitor, Body 1.6x0.8mm, Height 1.0mm, IPC High Density"
  rect 0.7x0.9 smd: 1(-0.7,0) 2(0.7,0)
  silkscreen extent -0.05,-0.35 0.05,0.35, body extent -0.87,-0.47 0.88,0.48, height 1
C_0603_TE [mm] "Vishay VJ0603 1.6 x 0.8 (+0.15/-0.1) 0.4 +/- 0,15mm Kontakte"
  rrect33% 0.88x0.71 smd: 1(0,0.77) 2(0,-0.77)
  body extent -0.4,-0.8 0.4,0.8, height 1
C_1206_TE [mm]
  rrect33% 1.82x1.21 smd: 1(0,1.45) 2(0,-1.45)
  silkscreen extent -0.9,-0.5 0.9,0.5, body extent -0.81,-1.6 0.81,1.6, height 1.82
C_1210_TE [mm]
  rrect33% 1.16x2.72 smd: 1(-1.475,0) 2(1.475,0)
  silkscreen extent -0.65,-1.35 0.7,1.35, body extent -1.6,-1.26 1.6,1.26, height 2.52
CAZN_M12-P4A-GPL_M12 [mm]
  round 1.8 hole 1.3: 1(1.768,1.768) 2(-1.768,1.768) 3(-1.768,-1.768) 4(1.768,-1.768)
  round 3.8 hole 2.85: MH1(-7.5,-4) MH2(7.5,-4)
  round 3 hole 2.1: MH3(-7.5,0) MH4(7.5,0)
  silkscreen extent -10,-23 10,4, body extent -9.69,-22.58 9.49,3.3, height 16.5
Design_info [mm] "Design information about the PCB"
KSTN-5019_V [mm] "Test Point, 1-Leads, Body 3.81x2.03mm"
  rect 3.8x2.03 smd: 1(0,0)
  silkscreen extent -2.26,-1.34 2.27,1.34, body extent -1.91,-1.02 1.9,1.02, height 2.29
LEM_HC5FW [mm]
  rect 2.5x1.5 hole 1: 1(0,0) 2(0,2.54) 3(0,5.08) 4(0,7.62)
  rect 5x3 hole 2: E1(-10.85,7.62) E2(-10.85,27.12) E3(10.85,27.12) E4(10.85,7.62)
  round 8 hole 16 unplated: MH1(0,17.37)
  silkscreen extent -13.85,-2.6 13.85,32.48, body extent -13.85,-1.27 13.85,32.48, height 12.4
MH_3.4#1 [mm]
  round 3.1 hole 3.4 unplated: 1(-2.1,20.3)
MH_3.4#2 [mm]
  round 3.1 hole 3.4 unplated: 1(1.5,15.5)
MH_3.4#3 [mm]
  round 3.1 hole 3.4 unplated: 1(76.6,126.4)
MH_3.4#4 [mm]
  round 3.1 hole 3.4 unplated: 1(1.5,0)
QFN65P500X500X100-21N-D [mm]
  rect 1.05x0.35 smd: 1(-2.35,1.3) 2(-2.35,0.65) 3(-2.35,0) 4(-2.35,-0.65) 5(-2.35,-1.3) 11(2.35,-1.3) 12(2.35,-0.65) 13(2.35,0) 14(2.35,0.65) 15(2.35,1.3)
  rect 0.35x1.05 smd: 6(-1.3,-2.35) 7(-0.65,-2.35) 8(0,-2.35) 9(0.65,-2.35) 10(1.3,-2.35) 16(1.3,2.35) 17(0.65,2.35) 18(0,2.35) 19(-0.65,2.35) 20(-1.3,2.35)
  rect 3.25x3.25 smd: 21(0,0)
  silkscreen extent -3.71,-3.17 3.18,3.17
R-RJ45R10P-B000 [mm]
  round 1.4 hole 0.9: A1(-4.425,3.842) A2(-3.155,6.382) A3(-1.885,3.842) A4(-0.615,6.382) A5(0.655,3.842) A6(1.925,6.382) A7(3.195,3.842) A8(4.465,6.382)
  round 1.065 hole 3.25 unplated: MH3(-5.69,-2.508) MH4(5.74,-2.508)
  round 2.3 hole 1.6: S1(-7.725,-5.5) S2(7.75,-5.5)
  silkscreen extent -8.03,-10.55 8.08,8.45, body extent -7.9,-10.43 7.9,8.37, height 14.5
R_0603_TE [mm] "Vishay D0603 1.55 x 0.85 (+0.1/-0.05) 0.3 +/- 0,2mm Kontakte"
  rrect33% 0.9x0.5 smd: 1(0,0.73) 2(0,-0.73)
  body extent -0.42,-0.78 0.43,0.77, height 0.45
RDN0011A-MFG [mm]
  rrect42% 1.2x0.475 smd paste-1000 mask-1000: 1(-1.4,1.962) 8(1.4,1.962)
  rrect57% 1.2x0.35 smd paste-1000 mask-1000: 2(-1.4,1.15) 3(-1.4,0.65) 6(1.4,0.65) 7(1.4,1.15)
  rrect13% 1.6x2.15 smd paste-1000 mask-1000: 4(-1.2,-1) 5(1.2,-1)
  rrect57% 0.35x0.9 smd paste-1000 mask-1000: 9(0.5,2.05) 10(0,2.05) 11(-0.5,2.05)
  Top Layer region: -0.2,2.4 -0.2,2.42 -0.185,2.457 -0.157,2.485 -0.12,2.5 -0.1,2.5 -0.1,2.5 0.1,2.5 0.12,2.5 0.157,2.485 0.185,2.457 0.2,2.42 0.2,2.4 0.2,2.4 0.2,1.515 0.201,1.507 0.207,1.493 0.218,1.482 0.232,1.476 0.24,1.475 0.24,1.475 0.24,1.475 0.248,1.475 0.263,1.469 0.274,1.458 0.28,1.443 0.28,1.435 0.28,1.435 0.28,-1.975 0.28,-1.995 0.265,-2.032 0.237,-2.06 0.2,-2.075 0.18,-2.075 0.18,-2.075 -0.18,-2.075 -0.2,-2.075 -0.237,-2.06 -0.265,-2.032 -0.28,-1.995 -0.28,-1.975 -0.28,-1.975 -0.28,1.435 -0.28,1.443 -0.274,1.458 -0.263,1.469 -0.248,1.475 -0.24,1.475 -0.24,1.475 -0.232,1.476 -0.218,1.482 -0.207,1.493 -0.201,1.507 -0.2,1.515 -0.2,1.515
  silkscreen extent -2.62,-2.42 2.1,2.6, body extent -2.1,-2.4 2.1,2.6, height 0.25
"RES 0603_1608" [mm] "Chip Resistor, 2-Leads, Body 1.60x0.80mm, IPC Medium Density"
  rect 0.85x0.95 smd: 1(-0.65,0) 2(0.65,0)
  silkscreen extent -1.27,-0.7 1.27,0.7, body extent -0.8,-0.4 0.8,0.4, height 0.45
SOIC127P600X175-8N [mm]
  rect 1.525x0.65 smd: 1(-2.712,1.905) 2(-2.712,0.635) 3(-2.712,-0.635) 4(-2.712,-1.905) 5(2.712,-1.905) 6(2.712,-0.635) 7(2.712,0.635) 8(2.712,1.905)
  silkscreen extent -2.92,-2.45 1.6,2.79, body extent -3,-2.45 3,2.45, height 1.75
TI_SOT23_6-Leads [mm] "SOT23, 6-Leads, Body 3.05x1.75mm, Pitch 0.95mm, IPC Medium Density"
  rrect17% 1x0.6 smd: 1(-1.375,0.95) 2(-1.375,0) 3(-1.375,-0.95) 4(1.375,-0.95) 5(1.375,0) 6(1.375,0.95)
  silkscreen extent -1.5,-1.55 0.5,1.92, body extent -1.42,-1.46 1.42,1.46, height 1.11
TP_1mm [mm]
  round 1 smd paste-1: 1(0,0)
  silkscreen extent -0.75,-0.75 0.75,0.75
UZ_Logo_small [mm] "logo width 3cm"
  silkscreen extent -0.05,0.57 29.94,12.12
"WE-CBF_0805_High Current" [mm] "SMD EMI Suppression Ferrite  Bead, body 2.0mmx1.2mm"
  rect 1.4x1 smd: 1(-1.3,0) 2(1.3,0)
  silkscreen extent -2.25,-0.75 2.25,0.75, body extent -1,-0.6 1,0.6, height 0.93
WL-SMCW_0603 [mm] "SMD Mono-color Chip LED, body 1.6x0.8mm"
  rect 0.8x0.8 smd: 1(-0.8,0) 2(0.8,0)
  silkscreen extent -1.59,-0.65 1.45,0.83, body extent -0.8,-0.4 0.8,0.4, height 0.7
ZC-Serial [mm] "Serialnumber"

## Part data
2V5 +6.5V VCC+: library part NULL, "Testpoint 1mm", Component Type=Testpoint, Created=2018_06_25_AGeiger, Created from=AGeiger, Created On="20/09/2022 13:14:57", Last Updated="20/09/2022 13:15:39", Live Cycle Status=1, Manufacturer=NULL, Manufacturer Part Number=NULL, PartID=9, Supplier 1=NULL, Supplier Part Number 1=NULL, Type=Testpoint
C1 C11 C12 C13 C25A C25B C25C C25D C30 C50 C51 C52: library part CL10A105KB8NNNC, "50V 1uF X5R ±10% 0603  Multilayer Ceramic Capacitors MLCC - SMD/SMT ROHS", Device Package=0603, LCSC Part Number=C15849, Manufacturer="Samsung Electro-Mechanics", Operating Temperature="-55 - 85°C", Tolerance="10 %", Voltage Rating="50 VDC", Component Type="Capacitor 0603", ComponentLink1Description=Datasheet, ComponentLink1URL=https://datasheet.lcsc.com/lcsc/1810261812_Samsung-Electro-Mechanics-CL10A105KB8NNNC_C15849.pdf, Created from=MGremer, Live Cycle Status=1, Manufacturer Part Number=CL10A105KB8NNNC, Mounting Type=SMD, PartID=5, Series=M, Stock number="Labor SMD Container", Supplier 1=LCSC, Supplier Part Number 1=C15849, Type=Capacitor
  C1 C11 C12 C13 C25A C25B C25C C25D C30 C52: Created On="20/12/2020 13:54:13", Last Updated="28/11/2022 17:23:01"
  C50 C51: Created On="20.12.2020 13:54:13", Last Updated="28.11.2022 17:23:01"
C2 C3 C4 C14 C34 C41 C42 C43 C45 C46 C47 C48 C49: library part FS32X225K101EGG, "100V 2.2uF X7R ±10% 1210 Multilayer Ceramic Capacitors MLCC - SMD/SMT ROHS", Device Package=1210, LCSC Part Number=C153036, Manufacturer="PSA(Prosperity Dielectrics)", Operating Temperature="-55 to +125°C", Tolerance=10%, Voltage Rating="100 VDC", Component Type="Capacitor 1210", ComponentLink1Description=Datasheet, ComponentLink1URL=https://www.lcsc.com/datasheet/lcsc_datasheet_2410121308_PSA-Prosperity-Dielectrics-FS32X225K101EGG_C153036.pdf, Created from=AGeiger, Created On="11.03.2025 16:22:30", Last Updated="27.05.2025 19:11:48", Live Cycle Status=1, Manufacturer Part Number=FS32X225K101EGG, Mounting Type=SMD, PartID=170, Series=FS, Supplier 1=LCSC, Supplier Part Number 1=C153036, Type=Capacitor
C5 C17A C17B C17C C17D C23A C23B C23C C23D C24A C24B C24C C24D C28A C28B C28C C28D C29A C29B C29C C29D C32 C33: library part C1608X7S2A104KT000N, "100V 100nF X7S ±10% 0603 Multilayer Ceramic Capacitors MLCC - SMD/SMT ROHS", Device Package=0603, LCSC Part Number=C343025, Manufacturer=TDK, Operating Temperature="-55 to 125°C", Tolerance="10 %", Voltage Rating="100 VDC", Component Type="Capacitor 0603", ComponentLink1Description=Datasheet, ComponentLink1URL=https://datasheet.lcsc.com/lcsc/2304140030_TDK-C1608X7S2A104KT000N_C343025.pdf, Created from=AGeiger, Created On="20.12.2020 13:54:13", Last Updated="14.12.2022 12:14:21", Live Cycle Status=1, Manufacturer Part Number=C1608X7S2A104KT000N, Mounting Type=SMD, PartID=148, Series=X7R, Stock number="not stored", Supplier 1=LCSC, Supplier Part Number 1=C343025, Type=Capacitor
C6 C7 C8 C9 C10 C19 C26 C31 C35 C36 C37A C37B C37C C37D C38A C38B C38C C38D C39 C40: library part GRM21BR6YA106KE43L, "Capacitor 0805, 35 VDC, 10 µF, X5R", Device Package=0805, LCSC Part Number=C162422, Manufacturer=muRata, Operating Temperature="-55 - 85°C", Supplier Part Number 1=81-GRM21BR6YA106KE3L, Tolerance="10 %", Voltage Rating="35 VDC", Component Type="Capacitor 0805", ComponentLink1Description=Datasheet, ComponentLink1URL=https://www.mouser.de/datasheet/2/281/murata_03052018_GRM_Series_1-1310166.pdf, Created from=MGremer, Created On="20.12.2020 13:54:13", Last Updated="20.12.2020 17:44:37", Live Cycle Status=1, Manufacturer Part Number=GRM21BR6YA106KE43L, Mounting Type=SMD, PartID=28, Series=GRM, Stock number="Labor SMD Container", Supplier 1=Mouser, Type=Capacitor
C15: library part 10TPE47MAZB, "Tantalum Capacitors - Polymer 10volts 47uF ESR 35mohm", Device Package="1210 (3528 metric)", LCSC Part Number=C147768, Manufacturer=Panasonic, Operating Temperature="-55 to +105°C", Supplier Part Number 1=667-10TPE47MAZB, Tolerance="20 %", Voltage Rating="10 VDC", Component Type="Tantalum Capacitor", ComponentLink1Description=Datasheet, ComponentLink1URL=https://industrial.panasonic.com/cdbs/www-data/pdf/AAA8000/AAA8000C36.pdf, Created from=Kilhan, Created On="26/06/2025 16:14:36", Last Updated="26/06/2025 16:39:07", Live Cycle Status=1, Manufacturer Part Number=10TPE47MAZB, Mounting Type=SMD, PartID=173, Series=TPE, Stock number="not stored", Supplier 1=Mouser, Supplier 2=LCSC, Supplier Part Number 2=C147768, Type=Capacitor
C16A C16B C16C C16D C20A C20B C20C C20D: library part C0603C471K5RACAUTO, "50V 470pF X7R ±10% 0603 Multilayer Ceramic Capacitors MLCC - SMD/SMT ROHS", Device Package=0603, LCSC Part Number=C129628, Manufacturer=KEMET, Operating Temperature="-55 - 125°C", Tolerance="10 %", Voltage Rating="50 VDC", Component Type="Capacitor 0603", ComponentLink1Description=Datasheet, ComponentLink1URL=https://lcsc.com/datasheet/lcsc_datasheet_2410010302_KEMET-C0603C471K5RACAUTO_C129628.pdf, Created from=KIlhan, Created On="07/07/2025 10:21:07", Last Updated="07/07/2025 10:21:07", Live Cycle Status=1, Manufacturer Part Number=C0603C471K5RACAUTO, Mounting Type=SMD, PartID=500, Series="SMD Comm X7R", Stock number="not stored", Supplier 1=JLCPCB, Supplier Part Number 1=C129628, Type=Capacitor
C18A C18B C18C C18D: library part 0603B562K500NT, "50V 5.6nF X7R ±10% 0603 Multilayer Ceramic Capacitors MLCC - SMD/SMT ROHS", Device Package=0603, LCSC Part Number=C1628, Manufacturer="FH (Guangdong Fenghua Advanced Tech)", Operating Temperature="–55 to 125°C", Tolerance=10%, Voltage Rating=50V, Component Type="Capacitor 0603", ComponentLink1Description=Datasheet, ComponentLink1URL=https://jlcpcb.com/api/file/downloadByFileSystemAccessId/8588903217349971968, Created from=Kilhan, Created On="18/06/2025 16:23:16", Last Updated="18/06/2025 16:23:16", Live Cycle Status=1, Manufacturer Part Number=0603B562K500NT, Mounting Type=SMD, PartID=171, Series=X7R, Stock number="not stored", Supplier 1=LCSC, Supplier Part Number 1=C1628, Type=Capacitor
C21A C21B C21C C21D C27A C27B C27C C27D: library part CL10C220JB8NNNC, "50V 22pF C0G ±5% 0603 Multilayer Ceramic Capacitors MLCC - SMD/SMT ROHS", Device Package=0603, LCSC Part Number=C1653, Manufacturer="Samsung Electro-Mechanics", Operating Temperature="–55 to 125°C", Tolerance=5%, Voltage Rating=50V, Component Type="Capacitor 0603", ComponentLink1Description=Datasheet, ComponentLink1URL=https://jlcpcb.com/api/file/downloadByFileSystemAccessId/8579707043277824000, Created from=Kilhan, Created On="22/06/2025 13:02:55", Last Updated="22/06/2025 13:02:55", Live Cycle Status=1, Manufacturer Part Number=CL10C220JB8NNNC, Mounting Type=SMD, PartID=172, Series=C0G, Stock number="not stored", Supplier 1=LCSC, Supplier Part Number 1=C1653, Type=Capacitor
C22A C22B C22C C22D C44A C44B C44C C44D: library part C0603C472K4RECAUTO, "Capacitor 0603, 16 VDC, 4.7 nF, X7R", Device Package=0603, LCSC Part Number=C2176713, Manufacturer=KEMET, Operating Temperature="-55 - 125°C", Supplier Part Number 1=80-C0603C472K4RECAUT, Tolerance="10 %", Voltage Rating="16 VDC", Component Type="Capacitor 0603", ComponentLink1Description=Datasheet, ComponentLink1URL=https://www.mouser.de/datasheet/2/212/1/KEM_C1090_X7R_ESD-1103328.pdf, Created from=MGremer, Created On="20/12/2020 13:54:13", Last Updated="05/08/2026 12:55:18", Live Cycle Status=1, Manufacturer Part Number=C0603C472K4RECAUTO, Mounting Type=SMD, PartID=35, Series="ESD SMD Auto X7R", Stock number="Labor SMD Container", Supplier 1=Mouser, Type=Capacitor
C53A C53B C53C C53D: library part CL10B473KB8NNNC, "Capacitor 0603, 50 VDC, 47 nF, X7R", Device Package=0603, LCSC Part Number=C1622, Manufacturer="Samsung Electro-Mechanics", Operating Temperature="-55 - 125°C", Supplier Part Number 1=187-CL10B473KB8NNNC, Tolerance="10 %", Voltage Rating="50 VDC", Component Type="Capacitor 0603", ComponentLink1Description=Datasheet, ComponentLink1URL=https://www.mouser.de/datasheet/2/585/MLCC-1837944.pdf, Created from=DHufnagel, Created On="20/07/2022 09:55:05", Last Updated="20/07/2022 09:55:05", Live Cycle Status=1, Manufacturer Part Number=CL10B473KB8NNNC, Mounting Type=SMD, PartID=97, Series=X7R, Stock number="not stored", Supplier 1=Mouser, Supplier 2=LCSC, Supplier Part Number 2=C1622, Type=Capacitor
C54: library part 1206CG101J102NT, "100pF 1kV C0G ±5% 1206 Multilayer Ceramic Capacitors MLCC - SMD/SMT ROHS", Device Package=1206, LCSC Part Number=C9188, Manufacturer="FH (Guangdong Fenghua Advanced Tech)", Operating Temperature="-55 to +125°C", Tolerance="5 %", Voltage Rating=1kV, Component Type="Capacitor 1206", ComponentLink1Description=Datasheet, ComponentLink1URL=https://jlcpcb.com/partdetail/9713-1206CG101J102NT/C9188, Created from=TGaupp, Created On="07/10/2026 14:40:40", Last Updated="07/10/2026 14:40:40", Live Cycle Status=1, Manufacturer Part Number=1206CG101J102NT, Mounting Type=SMD, PartID=514, Series=C0G, Stock number="not stored", Supplier 1=JLCPCB, Supplier Part Number 1=C9188, Type=Capacitor
D2 D3 D4: "LED RED 520~625NM 90~100MCD@20MA TOP VIEW 0603 ROHS", Color=red, Device Package=0603, Forward Current I_f="20 mA", Forward Voltage U_f="2.1 V", LCSC Part Number=C2286, Manufacturer="Hubei KENTO Elec", Nominal Power="42 mW", Operating Temperature="-40 - 85 °C", Component Type="LED Diode", ComponentLink1Description=Datasheet, ComponentLink1URL=https://datasheet.lcsc.com/szlcsc/Hubei-KENTO-Elec-KT-0603R_C2286.pdf, Created from="T. Wendt", Created On="03/03/2021 10:06:23", Last Updated="04/03/2021 09:02:49", Light Intensity="110 mcd", Live Cycle Status=1, Manufacturer Part Number=KT-0603R, Mounting Type=SMD, PartID=8, Stock number="not stored", Supplier 1=LCSC, Supplier Part Number 1=C2286, Type=Standard, Wavelength="620 nm"
F1: library part 0154005.DR, "Fuse OMNI BLOK 154", Device Package=OMNI-BLOK, LCSC Part Number=C206916, Manufacturer=Littlefuse, Nominal current="5 A", Nominal voltage AC="125 VAC", Nominal voltage DC="125 VDC", Operating Temperature="-55 - 125 °C", Resistance="12.5 mOhm", Supplier Part Number 1=576-0154005.DR, Component Type="NAN02 - 154 OMNI-BLOK", ComponentLink1Description=Datasheet, ComponentLink1URL=https://www.mouser.de/datasheet/2/240/Littelfuse_Fuse_154_154T_154L_154TL_Datasheet_pdf-365375.pdf, Created from=MGremer, Created On="07/01/2021 10:17:19", Last Updated="12/08/2025 20:50:24", Live Cycle Status=1, Manufacturer Part Number=0154005.DR, Mounting Type=SMD, PartID=1, Series=154, Supplier 1=Mouser, Supplier 2=LCSC, Supplier Part Number 2=C206916, Type=Fuse
GND PGOOD: library part NULL, Component Type=Testpoint, Created=2018_06_25_AGeiger, Created from=AGeiger, Live Cycle Status=1, Manufacturer=NULL, Manufacturer Part Number=NULL, PartID=9, Supplier 1=NULL, Supplier Part Number 1=NULL, Type=Testpoint
  GND: Created On="20/09/2022 13:14:57", Last Updated="20/09/2022 13:15:39"
  PGOOD: Created On="20.09.2022 13:14:57", Last Updated="20.09.2022 13:15:39"
IC2A IC2B IC2C IC2D: "-100 A - 100 A, 40 kHz", Device Package=THT, Manufacturer=LEM, Operating Temperature="-40 - 125°C", Supplier Part Number 1=61-HC5FW100-S, Component Type="Hall-Current Sensor", ComponentLink1Description=Datasheet, ComponentLink1URL=https://www.lem.com/sites/default/files/products_datasheets/hc5fw_100-s.pdf, Created from=TGaupp, Created On="01/07/2026 10:26:16", Datasheet Link=https://www.lem.com/sites/default/files/products_datasheets/cksr_series.pdf, Height=16mm, Last Updated="01/07/2026 10:26:16", Live Cycle Status=1, Manufacturer Part Number="HC5FW 100-S", Mounting Technology=THT, Mounting Type=THT, PartID=7, Series="HC5 Series", Stock number="not stocked", Supplier 1=Mouser, Type="Current Sensor"
INFO1: Manufacturer=UltraZohm, Supplier Part Number 1=-, Component Type="Design Information", ComponentLink1Description=https://docs.ultrazohm.com/, ComponentLink1URL=homepage, Created from=MGremer, Created On="03/11/2021 09:04:23", Last Updated="15/04/2025 09:29:36", Live Cycle Status=1, Manufacturer Part Number="Design Information", PartID=12, Supplier 1=-, Type="Design Information"
INFO2: library part ZC-Serial, Manufacturer=UltraZohm, Supplier Part Number 1=-, Component Type="ZC Serialnumber", ComponentLink1Description=https://docs.ultrazohm.com/, ComponentLink1URL=homepage, Created from=FRosner, Created On="15/04/2025 09:17:14", Last Updated="15/04/2025 09:17:14", Live Cycle Status=1, Manufacturer Part Number=ZC-Serial, PartID=58, Supplier 1=-, Type="Serial Number"
J5: "RJ45Receptacle 1 Shielded Bend insert Without LED 0℃~+70℃ Plugin Ethernet Connectors / Modular Connectors (RJ45 RJ11) ROHS", LCSC Part Number=C386758, Manufacturer="Ckmtw(Shenzhen Cankemeng)", Operating Temperature=0℃~+70℃, ComponentLink1Description=Datasheet, ComponentLink1URL=https://jlcpcb.com/api/file/downloadByFileSystemAccessId/8588892085580021760, Created from=KIlhan, Created On="20/03/2025 09:19:07", Last Updated="20/03/2025 13:46:21", Manufacturer Part Number=R-RJ45R10P-B000, Mounting Type=THT, PartID=57, Series=RJ45, Supplier 1=LCSC, Supplier Part Number 1=C386758
L1 L3 L13: library part 742792040, "Inductance, 0805, 100 MHz, 600 Ohm, 2 A", DC current="2 A", Device Package=0805, LCSC Part Number=C2661857, Manufacturer="Wuerth Elektronik", Operating Temperature="-55 - 125 °C", Supplier Part Number 1=710-742792040, Component Type=Inductance, ComponentLink1Description=Datasheet, ComponentLink1URL=https://www.mouser.de/datasheet/2/445/742792040-1720361.pdf, Created from=AGeiger, Created On="18/01/2021 14:53:17", Last Updated="22/08/2024 07:43:45", Live Cycle Status=1, Manufacturer Part Number=742792040, Mounting Type=SMD, PartID=1, Series=WE-CBF, Stock number="not stored", Supplier 1=Mouser, Type="Inductance SMD"
LOGO1: library part "Logo small", Manufacturer=UltraZohm, Supplier Part Number 1=-, Component Type=Logo, ComponentLink1Description=https://docs.ultrazohm.com/, ComponentLink1URL=homepage, Created=Jan2021_Liegmann, Created from=MGremer, Created On="03.11.2021 09:04:23", Last Updated="03.11.2021 09:05:50", Live Cycle Status=1, Manufacturer Part Number="Logo small", PartID=10, Supplier 1=-, Type=Logo
MH1 MH2 MH4 MH5 MH6: Device Package=-, Component Type="Mounting Hole", ComponentLink1Description=Datasheet, Created from=MHlatky, Created On="26.01.2021 09:19:51", Last Updated="21.03.2022 23:05:12", Live Cycle Status=1, Manufacturer="Mounting Hole", Manufacturer Part Number="Mounting Hole", PartID=16, Stock number="not stored", Supplier 1="Mounting Hole", Supplier Part Number 1="Mounting Hole", Type="Mounting Hole"
OUT_NA OUT_NB OUT_NC OUT_ND OUT_PA OUT_PB OUT_PC OUT_PD TP1A TP1B TP1C TP1D TP2A TP2B TP2C TP2D TP3A TP3B TP3C TP3D V_RefA V_RefB V_RefC V_RefD: "Circuit Board Hardware - PCB SM TEST POINT ON T&R - MINIATURE", Device Package=SMD, LCSC Part Number=C5199798, Manufacturer="Keystone Electronics", Supplier Part Number 1=534-5015, Component Type="Circuit Board Hardware", ComponentLink1Description=Datasheet, ComponentLink1URL=https://www.mouser.de/datasheet/2/215/015-744075.pdf, ComponentLink2Description=Datasheet, ComponentLink2URL=http://www.keyelco.com/product-pdf.cfm?p=1357, Created from=AGeiger, Created On="03/06/2023 11:19:55", Last Updated="03/06/2023 11:43:17", Live Cycle Status=1, Manufacturer Part Number=5015, Mounting Type=SMD, PartID=26, Supplier 1=Mouser, Type="PCB SMD Testpoint"
R1 R6 R7 R8 R9 R10 R17 R18 R38: library part 0603WAF1002T5E, "SMD resistor 1%", Device Package=0603, LCSC Part Number=C25804, Manufacturer=UNI-ROYAL, Tolerance=1%, Component Type="SMD resistor", ComponentLink1Description=Datasheet, ComponentLink1URL=https://datasheet.lcsc.com/lcsc/2206010045_UNI-ROYAL-Uniroyal-Elec-0603WAF1002T5E_C25804.pdf, Created from=AGeiger, Created On="01/06/2023 06:49:29", Last Updated="01/06/2023 06:49:29", Live Cycle Status=1, Manufacturer Part Number=0603WAF1002T5E, Mounting Type=SMD, PartID=265, Supplier 1=LCSC, Supplier Part Number 1=C25804, Type=Resistor
R2: library part CRCW0603100KFKEAC, "SMD resistor 1%", Device Package=0603, LCSC Part Number=C844722, Manufacturer=Vishay, Supplier Part Number 1=71-CRCW0603100KFKEAC, Tolerance=1%, Component Type="SMD resistor", ComponentLink1Description=Datasheet, ComponentLink1URL=https://www.mouser.de/datasheet/2/427/crcwce3-1762584.pdf, Created from=MGremer, Created On="14/12/2020 16:17:14", Last Updated="05/08/2026 13:09:54", Live Cycle Status=1, Manufacturer Part Number=CRCW0603100KFKEAC, Mounting Type=SMD, PartID=181, Stock number="not stored", Supplier 1=Mouser, Type=Resistor
R3 R4 R30 R31 R32 R33 R34 R35 R36 R37: library part RC0603JR-070RL, "SMD resistor E24 series", Device Package=0603, LCSC Part Number=C21189, Manufacturer=YAGEO, Supplier Part Number 1=603-RC0603JR-070RL, Tolerance=5%, Component Type="SMD resistor", ComponentLink1Description=Datasheet, ComponentLink1URL=https://www.mouser.de/datasheet/2/447/PYu-RC_Group_51_RoHS_L_10-1664068.pdf, Created from=MGremer, Created On="14/12/2020 16:17:14", Last Updated="04/03/2021 09:09:42", Live Cycle Status=1, Manufacturer Part Number=RC0603JR-070RL, Mounting Type=SMD, PartID=1, Stock number="Labor SMD Container", Supplier 1=Mouser, Supplier 2=LCSC, Supplier Part Number 2=C21189, Type=Resistor
R5: library part 0603WAF5102T5E, "100mW Thick Film Resistors 75V ±100ppm/℃ ±1% 51kΩ 0603 Chip Resistor - Surface Mount ROHS", Device Package=0603, LCSC Part Number=C23196, Manufacturer="UNI-ROYAL(Uniroyal Elec)", Tolerance=1%, Component Type="SMD resistor", ComponentLink1Description=Datasheet, ComponentLink1URL=https://jlcpcb.com/api/file/downloadByFileSystemAccessId/8579706288655699968, Created from=KIlhan, Created On="16/06/2025 17:07:49", Last Updated="18/06/2025 13:28:44", Live Cycle Status=1, Manufacturer Part Number=0603WAF5102T5E, Mounting Type=SMD, PartID=363, Stock number="not stored", Supplier 1=LCSC, Supplier Part Number 1=C23196, Type=Resistor
R11A R11B R11C R11D R16A R16B R16C R16D: library part ERJ-PB3B2001V, "SMD resistor 0.1%", Device Package=0603, LCSC Part Number=C189729, Manufacturer=Panasonic, Supplier Part Number 1=667-ERJ-PB3B2001V, Tolerance=0.1%, Component Type="SMD resistor", ComponentLink1Description=Datasheet, ComponentLink1URL=https://www.mouser.de/datasheet/2/315/AOA0000C328-1530132.pdf, Created from=DHufnagel, Created On="14/12/2020 16:17:14", Last Updated="02/03/2021 14:07:32", Live Cycle Status=1, Manufacturer Part Number=ERJ-PB3B2001V, Mounting Type=SMD, PartID=215, Stock number="not stored", Supplier 1=Mouser, Supplier 2=LCSC, Supplier Part Number 2=C189729, Type=Resistor
R12A R12B R12C R12D R14A R14B R14C R14D: library part AR03BTCX1001, "100mW ±0.1% ±25ppm/℃ 1kΩ 0603 Chip Resistor - Surface Mount ROHS", Device Package=0603, LCSC Part Number=C304069, Manufacturer="Viking Tech", Tolerance=0.1%, Component Type="SMD resistor", ComponentLink1Description=Datasheet, ComponentLink1URL=https://datasheet.lcsc.com/lcsc/2011191435_Viking-Tech-AR03BTCX1001_C304069.pdf, Created from=AGeiger, Created On="03/09/2022 10:12:43", Last Updated="03/09/2022 10:12:43", Live Cycle Status=1, Manufacturer Part Number=AR03BTCX1001, Mounting Type=SMD, PartID=240, Supplier 1=LCSC, Supplier Part Number 1=C304069, Type=Resistor
R13A R13B R13C R13D R15A R15B R15C R15D: library part RC0603FR-0749R9L, "100mW Thick Film Resistors ±100ppm/℃ ±1% 49.9Ω 0603 Chip Resistor - Surface Mount ROHS", Device Package=0603, LCSC Part Number=C114625, Manufacturer=YAGEO, Tolerance=1%, Component Type="SMD resistor", ComponentLink1Description=Datasheet, ComponentLink1URL=https://datasheet.lcsc.com/lcsc/2304140030_YAGEO-RC0603FR-0749R9L_C114625.pdf, Created from=AGeiger, Created On="14/06/2023 17:42:26", Last Updated="14/06/2023 17:42:26", Live Cycle Status=1, Manufacturer Part Number=RC0603FR-0749R9L, Mounting Type=SMD, PartID=277, Supplier 1=LCSC, Supplier Part Number 1=C114625, Type=Resistor
R19: library part CRCW06031M00FKEAC, "SMD resistor 1%", Device Package=0603, LCSC Part Number=C844537, Manufacturer="Vishay / Dale", Supplier Part Number 1=71-CRCW06031M00FKEAC, Tolerance=1%, Component Type="SMD resistor", ComponentLink1Description=Datasheet, ComponentLink1URL=https://www.mouser.de/datasheet/2/427/crcwce3-1762584.pdf, Created from=MGremer, Created On="14/12/2020 16:17:14", Last Updated="07/10/2026 14:27:53", Live Cycle Status=1, Manufacturer Part Number=CRCW06031M00FKEAC, Mounting Type=SMD, PartID=179, Stock number="not stored", Supplier 1=Mouser, Type=Resistor